# Altium PCB CH582M-Keypad.PcbDoc
Units mil, origin at the board's own origin, x right, y up, seen from the top; angles counter-clockwise.
Board outline 6000 x 4000 mil, 2 copper layers (Top Layer, Bottom Layer); 38 components, 55 nets, 105 pads, 0 vias.
Unrouted connection lines stored in the file: 68.
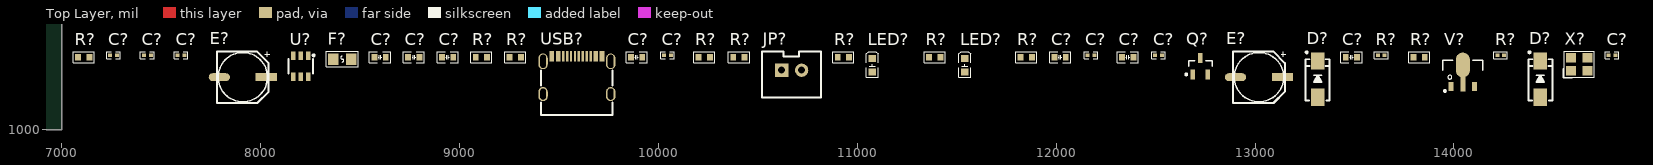
[diagram p0: Top Layer view]
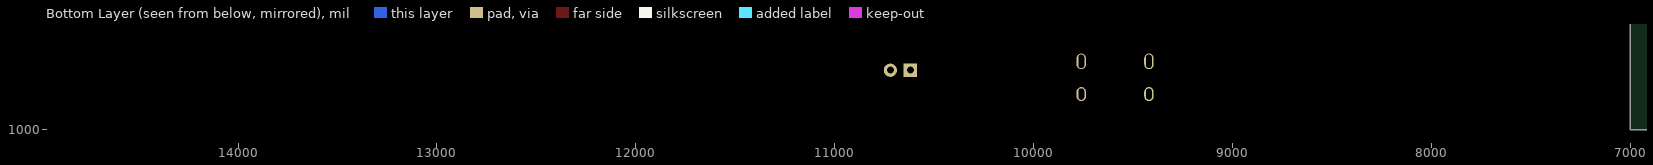
[diagram p1: Bottom Layer view, seen from below]

## Layer stack, top to bottom
Top Solder: solder mask 0.4, Solder Resist, Dk 3.5
Top Layer: signal copper 1.4
Dielectric 1: dielectric 12.6, FR-4, Dk 4.8
Bottom Layer: signal copper 1.4
Bottom Solder: solder mask 0.4, Solder Resist, Dk 3.5

## Board outline
1000,1000 7000,1000 7000,5000 1000,5000

## Design rules (kind name [scope] priority, off if disabled: settings)
Clearance [All] p1: gap=10 ignorepadtopadclearanceinfootprint=FALSE except(0: Arc-Hole Track-Hole SMDPad-Hole THPad-Hole Via-Hole Fill-Hole Poly-Hole Region-Hole Text-Hole)
PolygonConnect [All] p1: connectstyle=Relief reliefconductorwidth=10 reliefentries=4 polygonreliefangle="90 Angle" airgapwidth=10
RoutingVias [All] p1: holewidth=28 width=50 viastyle="Through Hole" minholewidth=28 minwidth=50 maxholewidth=28 maxwidth=50
SolderMaskExpansion [All] p1: expansion=4 istentingtop=FALSE
Width [All] p1: maxlimit=10 minlimit=10 preferedwidth=10
30 further rules are at their usual default settings.

## Classes and differential pairs
component class CH582M-Keypad: C? D? E? EC? F? JP? L? LED? OLED? Q? R? SW? U? USB? V? X?

## Components (designator, comment, footprint, x,y, rotation, side; value= is the part's Value field where it differs from the comment)
C? "10uF 10% 6.3V" C0603_L 12360,1365 r0 top
C? "2.2uF 10% 6.3V" C0603_L 8600,1365 r0 top
C? "18pF 5% 50V" C0402_L 14795,1375 r0 top
C? "18pF 5% 50V" C0402_L 12175,1375 r0 top
C? "100nF 10% 50V" C0402_L 12515,1375 r0 top
C? "100nF 10% 50V" C0402_L 7430,1375 r0 top
C? "100nF 10% 50V" C0402_L 7260,1375 r0 top
C? "100nF 10% 50V" C0402_L 10045,1375 r0 top
C? "100nF 10% 50V" C0402_L 7600,1375 r0 top
C? "100nF 10% 100V" C0603_L 8940,1365 r0 top
C? "2.2uF 10% 6.3V" C0603_L 8770,1365 r0 top
C? "10uF 10% 6.3V" C0603_L 13485,1365 r0 top
C? "10uF 10% 16V" C0603_L 9890,1365 r0 top
C? "10uF 10% 6.3V" C0603_L 12020,1365 r0 top
D? "SS34" SMA 14435,1255 r90 top
D? "SS34" SMA 13315,1255 r90 top
E? "100uF/25V" "CE D(6.3*7.7)" 7910,1265 r0 top
E? "100uF/25V" "CE D(6.3*7.7)" 13020,1265 r0 top
F? "6V 1A" F0805 8410,1355 r0 top
JP? "HDR-1X2" XH2.54-LI-2P 10670,1300 r0 top
LED? "红色" LED0603-FD 11075,1325 r90 top
LED? "蓝色" LED0603-FD 11540,1325 r90 top
Q? "AO3401A" SOT23-3N 12725,1320 r0 top
R? "1K  5%" R0603_L 7110,1365 r0 top
R? "10k 5%" R0603_L 10405,1365 r0 top
R? "100K  5%" R0603_L 11850,1365 r0 top
R? "100K  1%" R0603_L 10230,1365 r0 top
R? "5.1K  1%" R0603_L 9110,1365 r0 top
R? "1K  5%" R0603_L 11390,1365 r0 top
R? "5.1K  1%" R0603_L 9280,1365 r0 top
R? "1M 1%" R0402_L 13635,1375 r0 top
R? "1.2K  1%" R0603_L 13825,1365 r0 top
R? "22R 1%" R0402_L 14235,1375 r0 top
R? "47K  1%" R0603_L 10930,1365 r0 top
U? "sn74lvc1t45dbvr" SOT-23-6_L2.9-W1.6-P0.95-LS2.8-BR 8205,1315 r0 top
USB? "KH-TYPE-C-16P" KH-TYPE-C 9590,1275 r0 top
V? "AMS1117-3V3" SOT89_L 14045,1230 r0 top
X? "32MHz/10ppm" OSC-3225-4P 14630,1330 r0 top

## Footprints (in the part's own frame and the unit in brackets; to place one, negate y for a bottom-side part, rotate by r counter-clockwise, add the part's x,y. Pads: shape width x height; smd on the part's side, far side on the other; paste and mask are expansions set on the pad)
C0402_L [mm] "贴片MLCC电容"
  rect 0.5x0.5 smd: 1(-0.45,0) 2(0.45,0)
  silkscreen extent -0.87,-0.46 0.88,0.46, body extent -0.5,-0.25 0.5,0.25, height 0.5
C0603_L [mm] "贴片MLCC电容"
  rect 0.75x0.85 smd: 1(-0.725,0) 2(0.725,0)
  silkscreen extent -1.35,-0.69 1.35,0.69, body extent -0.8,-0.4 0.8,0.4, height 0.8
"CE D(6.3*7.7)" [mm] "贴片电解电容，直径6.3mm，高7.7mm"
  rect 2.7x1 smd: 1(3,0)
  oval 2.7x1 smd: 2(-3,0)
  silkscreen extent -3.3,-3.3 3.43,3.3, body extent -3.5,-3.3 3.5,3.3, height 7.75
F0805 [mm] "0805贴片自恢复保险丝(PPTC)   联系卖家 免费查找封装"
  rect 1.335x1.5 smd: 1(-1.142,0) 2(1.142,0)
  silkscreen extent -2.05,-0.97 2.05,1, body extent -1.05,-0.7 1.05,0.7, height 0.8
KH-TYPE-C [mm]
  oval 1.2x2 hole 0.7 slot 1.7 at 90 deg paste+0 mask+0.051: 1(-4.32,1.765) 2(4.32,1.765)
  oval 1.2x1.8 hole 0.7 slot 1.4 at 90 deg paste+0 mask+0.051: 3(-4.32,-2.415) 4(4.32,-2.415)
  round 0 hole 0.7: 8(-2.89,1.235) 8(2.89,1.235)
  rect 0.3x1.3 smd paste-100 mask+0.05: A1(-3.35,2.415) A4(-2.55,2.415) A5(-1.25,2.415) A6(-0.25,2.415) A7(0.25,2.415) A8(1.25,2.415) A9(2.55,2.415) A12(3.35,2.415) B1(3.05,2.415) B4(2.25,2.415) B5(1.75,2.415) B6(0.75,2.415) B7(-0.75,2.415) B8(-1.75,2.415) B9(-2.25,2.415) B12(-3.05,2.415)
  silkscreen extent -4.57,-5.08 4.57,0.57
LED0603-FD [mm]
  rect 0.9x1 smd: 1(-0.85,0) 2(0.85,0)
  silkscreen extent -1.55,-0.75 1.75,0.75
OSC-3225-4P [mm] "3.2*2.5*0.7mm(长宽高)                             淘宝ID:黄晶宝石"
  rect 1.3x1.2 smd: 1(-1.05,-0.85) 2(1.05,-0.85) 3(1.05,0.85) 4(-1.05,0.85)
  silkscreen extent -2.03,-1.75 1.91,1.65, body extent -1.6,-1.25 1.6,1.25, height 0.7
R0402_L [mm] "1/16W贴片电阻"
  rect 0.5x0.5 smd: 1(-0.425,0) 2(0.425,0)
  silkscreen extent -0.88,-0.46 0.87,0.46, body extent -0.5,-0.25 0.5,0.25, height 0.3
R0603_L [mm] "1/10W贴片电阻"
  rect 0.75x0.85 smd: 1(-0.725,0) 2(0.725,0)
  silkscreen extent -1.35,-0.69 1.35,0.69, body extent -0.8,-0.4 0.8,0.4, height 0.4
SMA [mm] "4.5x2.6*2.2mm（长宽高，不包括引脚）联系卖家 免费查找封装"
  rect 2.2x1.75 smd: 1(-2.3,0) 2(2.3,0)
  silkscreen extent -2.7,-1.52 3.56,1.52, body extent -2.55,-1.3 2.55,1.3, height 2.15
SOT23-3N [mm] "SOT23, 3-Leads, Body 2.9x1.3mm, Pitch 0.95mm, Lead Span 2.4mm, IPC Medium Density  联系卖家 获取最新版本"
  rect 0.6x1.3 smd: 1(-0.95,-1.05) 2(0.95,-1.05) 3(0,1.05)
  silkscreen extent -1.92,-1.17 1.5,0.7, body extent -1.5,-1.2 1.5,1.2, height 1.05
SOT89_L [mm] "4.6x4.3x1.6mm(长宽高)                联系卖家 免费查找封装"
  rect 0.66x1.2 smd: 1(-1.5,-0.303) 3(1.5,-0.303)
  rect 0.66x2.1 smd: 2(0,0.127)
  oval 1.8x3.175 smd: 2(0,2.441)
  silkscreen extent -2.54,-1 2.54,3.05, body extent -2.3,-0.8 2.3,3.5, height 1.6
SOT-23-6_L2.9-W1.6-P0.95-LS2.8-BR [mm]
  rect 0.6x1.1 smd paste+0 mask+0.051: 1(0.855,1.471) 2(-0.095,1.471) 3(-1.045,1.471) 4(-1.045,-1.229) 5(-0.095,-1.229) 6(0.855,-1.229)
  silkscreen extent -1.64,-0.78 1.68,1.65
XH2.54-LI-2P [mm] "接插件，2P"
  rect 1.7x1.7 hole 0.9: 1(-1.27,0)
  round 1.7 hole 0.9: 2(1.27,0)
  silkscreen extent -3.81,-3.51 3.74,2.37, body extent -3.77,-3.3 3.77,2.4, height 7.05

## Part data
C? C? C? C? C? C? C? C? C? C? C? C? C? C?: library part C, "贴片电容", BOM名称=无极性贴片电容, 优秀评价可免费更新=联系淘宝ID：黄晶宝石，获取更新版封装库, 卖家免费技术支持，联系售后=唯一出售店铺网址https://shop463601444.taobao.com, 本封装库来自淘宝卖家 ID：黄晶宝石=其他店铺购入均为盗版，请立即申请退款
D? D?: library part 1N4007(M7), "正向压降(Vf):1.1V@1A;直", Current - Rectified=800mA, JLCPCB Part Class="Extended Part", Manufacturer=UMW(友台半导体), Non-Repetitive Peak Forward Surge Current=30A, Operating Junction Temperature Range=-55℃~+150℃, Reverse Leakage Current (Ir)=5uA@1kV, Voltage - DC Reverse(Vr)=1kV, Voltage - Forward(Vf@If)=1.1V@1A, AddInBom=yes, ConvertToPcb=yes, Datasheet=https://item.szlcsc.com/datasheet/1N4007(M7)/3446980.html, Device=1N4007(M7), FootprintName=SMA_L4.3-W2.7-LS5.1-RD, LCSC Part Name=1N4007(M7), ManufacturerPart=1N4007(M7), ModelId=5b7d57c23c9f472788911caf890f0710聨0819f05c4eef4c71ace90d822a990e87, ModelName=SMA_L4.3-W2.7-LS5.1-RD, ModelTransform=198.4248,106.299,0,0,0,0,0,0,0, Supplier=LCSC, Supplier Footprint=SMA(DO-214AC), SupplierPart=C2988638, Symbol=1N4007(M7)
E? E?: library part CE_SMD, "贴片电解电容", BOM名称=贴片电解电容, 当前库版本V2023.10.25 @淘宝卖家:黄晶宝石=最新版本发布https://item.taobao.com/item.htm?id=566775463719
F?: library part "FUSE 1808", "0805自恢复保险座", BOM名称=1808保险座, 当前库版本V2023.10.25 @淘宝卖家:黄晶宝石=最新版本发布https://item.taobao.com/item.htm?id=566775463719
JP?: library part "Header 2", "2P接插件", BOM名称=2P接插件, 封装库来自淘宝卖家ID：黄晶宝石=其他店铺购入均为盗版封装库，请立即申请退款，本店现金奖励50~200元, 联系卖家，免费查找封装=唯一出售店铺网址https://shop463601444.taobao.com
LED? LED?: library part LED, "贴片LED", BOM名称=贴片LED, 封装库来自淘宝卖家：黄晶宝石=其他店铺购入均为盗版封装库，无更新权益，请立即申请退款，本店现金奖励200~1000元
Q?: library part AO3401, "P沟道 30V/4.2A", BOM名称=场效应管, 参数="P沟道 30V/4.2A", 联系下单店铺卖家 免费帮你查找封装="联系下单店铺卖家 免费技术支持"
R? R? R? R? R? R? R? R? R? R? R?: library part R, "贴片电阻", BOM名称=贴片电阻, 优秀评价可免费更新=联系淘宝ID：黄晶宝石，获取更新版封装库, 卖家免费技术支持，联系售后=唯一出售店铺网址https://shop463601444.taobao.com, 本封装库来自淘宝卖家 ID：黄晶宝石=其他店铺购入均为盗版，请立即申请退款
U?: "数据速率:420Mbps;工作电压(VCCA):1.65V~5.5V;工作电压(VCCB):1.65V~5.5V;通道数:1;每个电路通道数:1;", JLCPCB Part Class="Extended Part", LCSC Part Name=SN74LVC1T45DBVR, Manufacturer=TI(德州仪器), Operating Temperature=-40℃~+85℃, Voltage - Supply(VCCA)=1.65V~5.5V, AddInBom=yes, Channel Type=双向, ConvertToPcb=yes, Data Rate=420Mbps, Datasheet=https://www.ti.com/cn/lit/gpn/sn74lvc1t45, FootprintName=SOT-23-6_L2.9-W1.6-P0.95-LS2.8-BR, ManufacturerPart=SN74LVC1T45DBVR, ModelId=18da8f6c14a34920b3e136b5c401a119, ModelName=SOT-23-6_L2.9-W1.6-H1.5-LS2.8-P0.95, ModelTransform=110.73671,114.173,0,180,0,0,0.001,-0.003,0, Number of Circuits=1, Output Type=三态, Supplier=LCSC, Supplier Footprint=SOT-23-6, SupplierPart=C7843, Symbol=SN74LVC1T45DBVR, Voltage - Supply(VCCB)=1.65V~5.5V
USB?: BOM_JLCPCB Part Class="Extended Part", BOM_Manufacturer="Shenzhen Kinghelm Elec", BOM_Manufacturer Part=KH-TYPE-C-16P, BOM_Supplier=LCSC, BOM_Supplier Part=C709357, Contributor=LCSC, spicePre=U, spiceSymbolName=KH-TYPE-C-16P
V?: library part AMS1117, "三端稳压芯片", BOM名称=稳压芯片, 优秀评价可免费更新=联系淘宝ID：黄晶宝石，获取更新版封装库, 卖家免费技术支持，联系售后=唯一出售店铺网址https://shop463601444.taobao.com, 封装库来自淘宝卖家 ID：黄晶宝石=其他店铺购入均为假冒，请立即申请退款，本店奖励2~5元现金
X?: library part OSC44M_5, "晶振"

## Nets (pads, with @x,y where several pads share a name; then routed paths per layer and width w, separated by ;. In a path a pad name is that pad's centre, name@x,y a point inside that pad or via, vN(x,y) a via of type N, cw(c..) or ccw(c..) an arc to the next point about the centre after c; other vN are vias at no path point)
3V3: C?.1@7412.28,1375 C?.2@12532.72,1375 E?.1@13138.11,1265 R?.1@10376.46,1365 V?.2
5V0: C?.1@8741.46,1365 C?.1@8911.46,1365 C?.2@12048.54,1365 D?.1@13315,1164.45 F?.1 Q?.1 R?.1@7081.46,1365 R?.1@11821.46,1365
ADC_IN1: 
ANT: 
CGND: USB?.1 USB?.2 USB?.3 USB?.4
GND: C?.1@7242.28,1375 C?.1@9861.46,1365 C?.1@10027.28,1375 C?.1@11991.46,1365 C?.1@12157.28,1375 C?.1@12331.46,1365 C?.1@12497.28,1375 C?.1@14777.28,1375 C?.2@7447.72,1375 C?.2@7617.72,1375 C?.2@8798.54,1365 C?.2@13513.54,1365 E?.2 JP?.2 R?.1@9251.46,1365 R?.2@9138.54,1365 R?.2@10258.54,1365 R?.2@11878.54,1365 R?.2@13853.54,1365 U?.1 USB?.A1 USB?.A12 USB?.B1 USB?.B12 V?.1 X?.2 X?.4
IO10: 
IO11: 
IO12: 
KEY_IN1: 
KEY_IN2: 
KEY_IN3: 
KEY_IN4: 
KEY_IN5: 
KEY_IN6: 
KEY_IN7: 
KEY_IN8: 
KEY_IN9: 
KEY_IN10: 
KEY_IN11: 
KEY_IN12: 
KEY_IN13: 
KEY_IN14: 
KEY_IN15: 
NetC?_1: C?.1@13456.46,1365 R?.2@7138.54,1365 R?.2@11418.54,1365
NetC?_2: C?.2@8628.54,1365
NetD?_2: D?.2 Q?.2 V?.3
NetL?_1: 
NetLED?_1: LED?.1 R?.1@11361.46,1365
NetLED?_2: LED?.2@11075,1358.46
NetR?_1: R?.1@13796.46,1365 U?.2
NetR?_2: R?.2@9308.54,1365 USB?.A5
OLED_SCL: 
OLED_SDA: 
RGB_CTRL: U?.3
RST: C?.2@9918.54,1365 R?.2@10433.54,1365
RXD0: 
RXD1: 
TCK: 
TIO: 
TXD0: 
TXD1: 
TXD2: U?.4
USB1_DN: 
USB1_DP: 
USB2_DN: 
USB2_DP: 
USB_D_N: USB?.A7 USB?.B7
USB_D_P: USB?.A6 USB?.B6
VBAT: C?.1@7582.28,1375 C?.2@7277.72,1375 C?.2@12388.54,1365 D?.1@14435,1164.45 E?.1@8028.11,1265 JP?.1 Q?.3 R?.1@10901.46,1365 U?.5 U?.6
VBAT_ADC: C?.2@10062.72,1375 R?.1@10201.46,1365 R?.2@10958.54,1365
VCC: 
Vusb: F?.2 USB?.A4 USB?.A9 USB?.B4 USB?.B9
X32MI: R?.1@13618.27,1375 R?.2@14251.73,1375
X32MO: C?.2@12192.72,1375 R?.2@13651.73,1375 X?.1
pads on no net: C?.1@8571.46,1365 C?.2@8968.54,1365 C?.2@14812.72,1375 LED?.2@11540,1358.46 R?.1@9081.46,1365 R?.1@14218.27,1375 USB?.8 USB?.A8 USB?.B5 USB?.B8 X?.3